# Altium PCB lab timer.PcbDoc
Units mil, origin at the board's own origin, x right, y up, seen from the top; angles counter-clockwise.
Board outline 6000 x 4000 mil, 2 copper layers (Top Layer, Bottom Layer); 7 components, 0 nets, 24 pads, 0 vias.
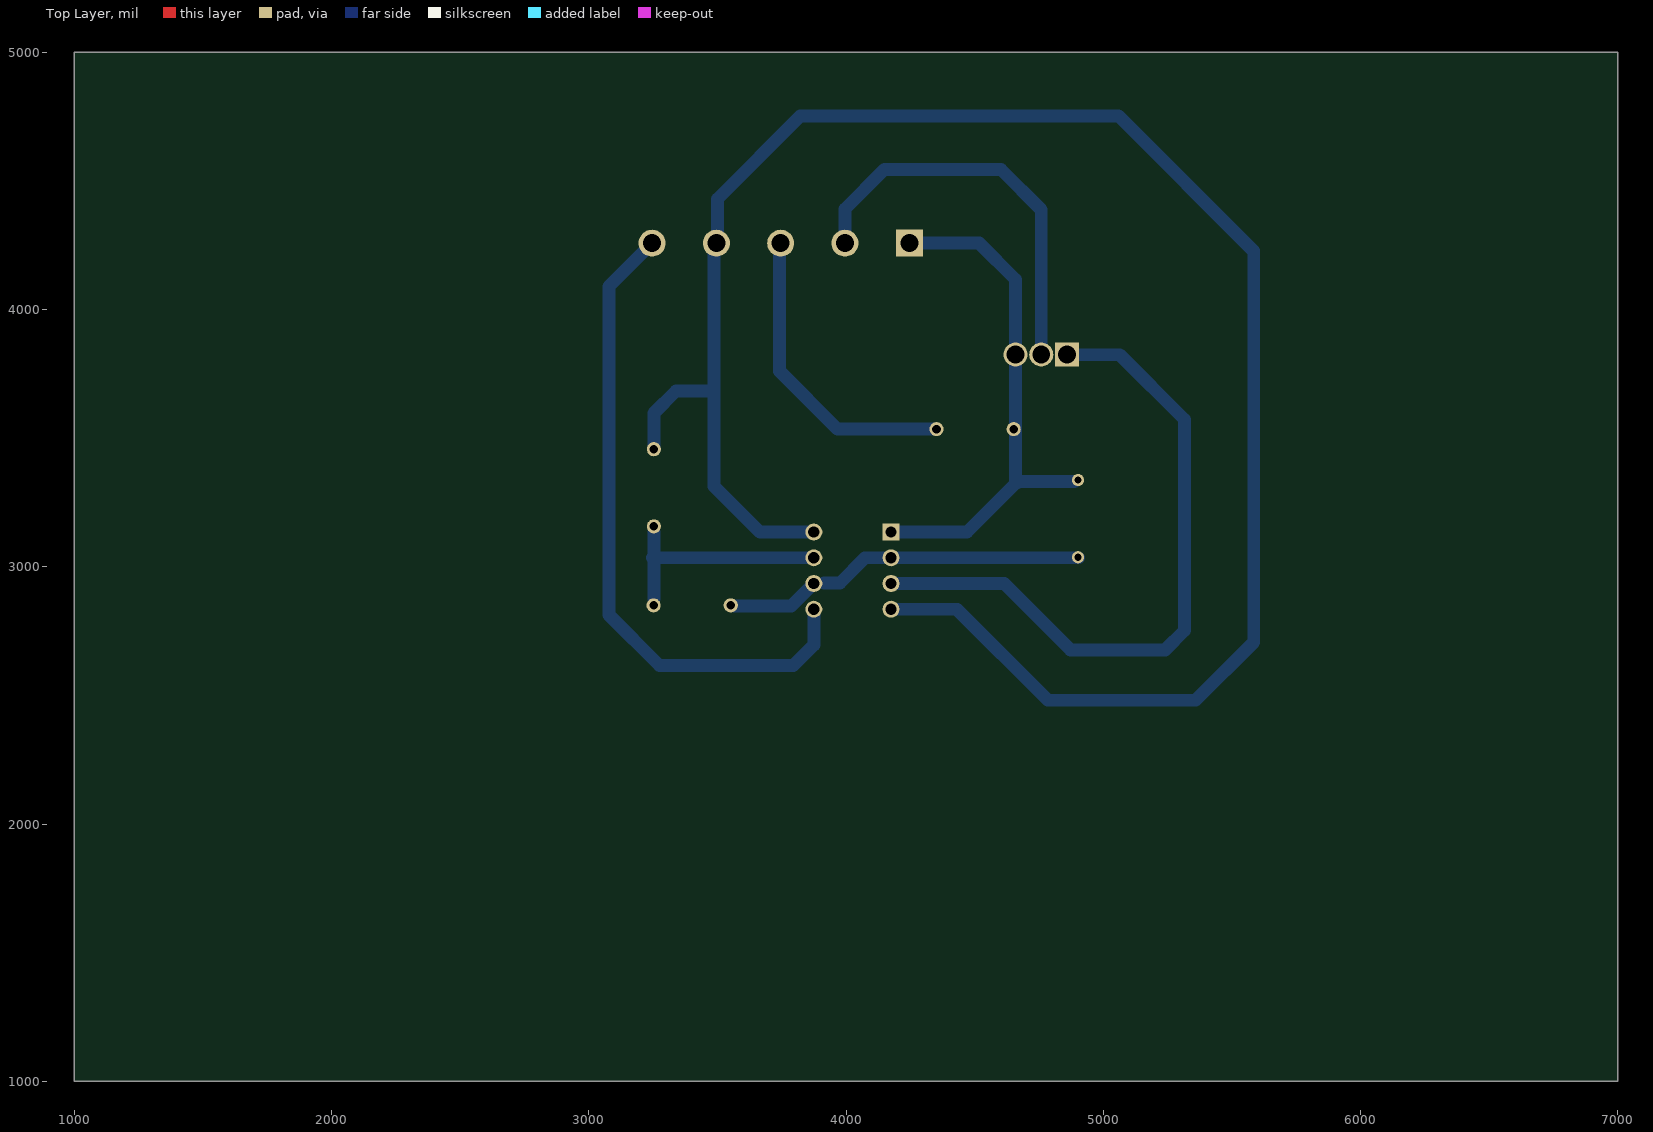
[diagram p0: Top Layer view]
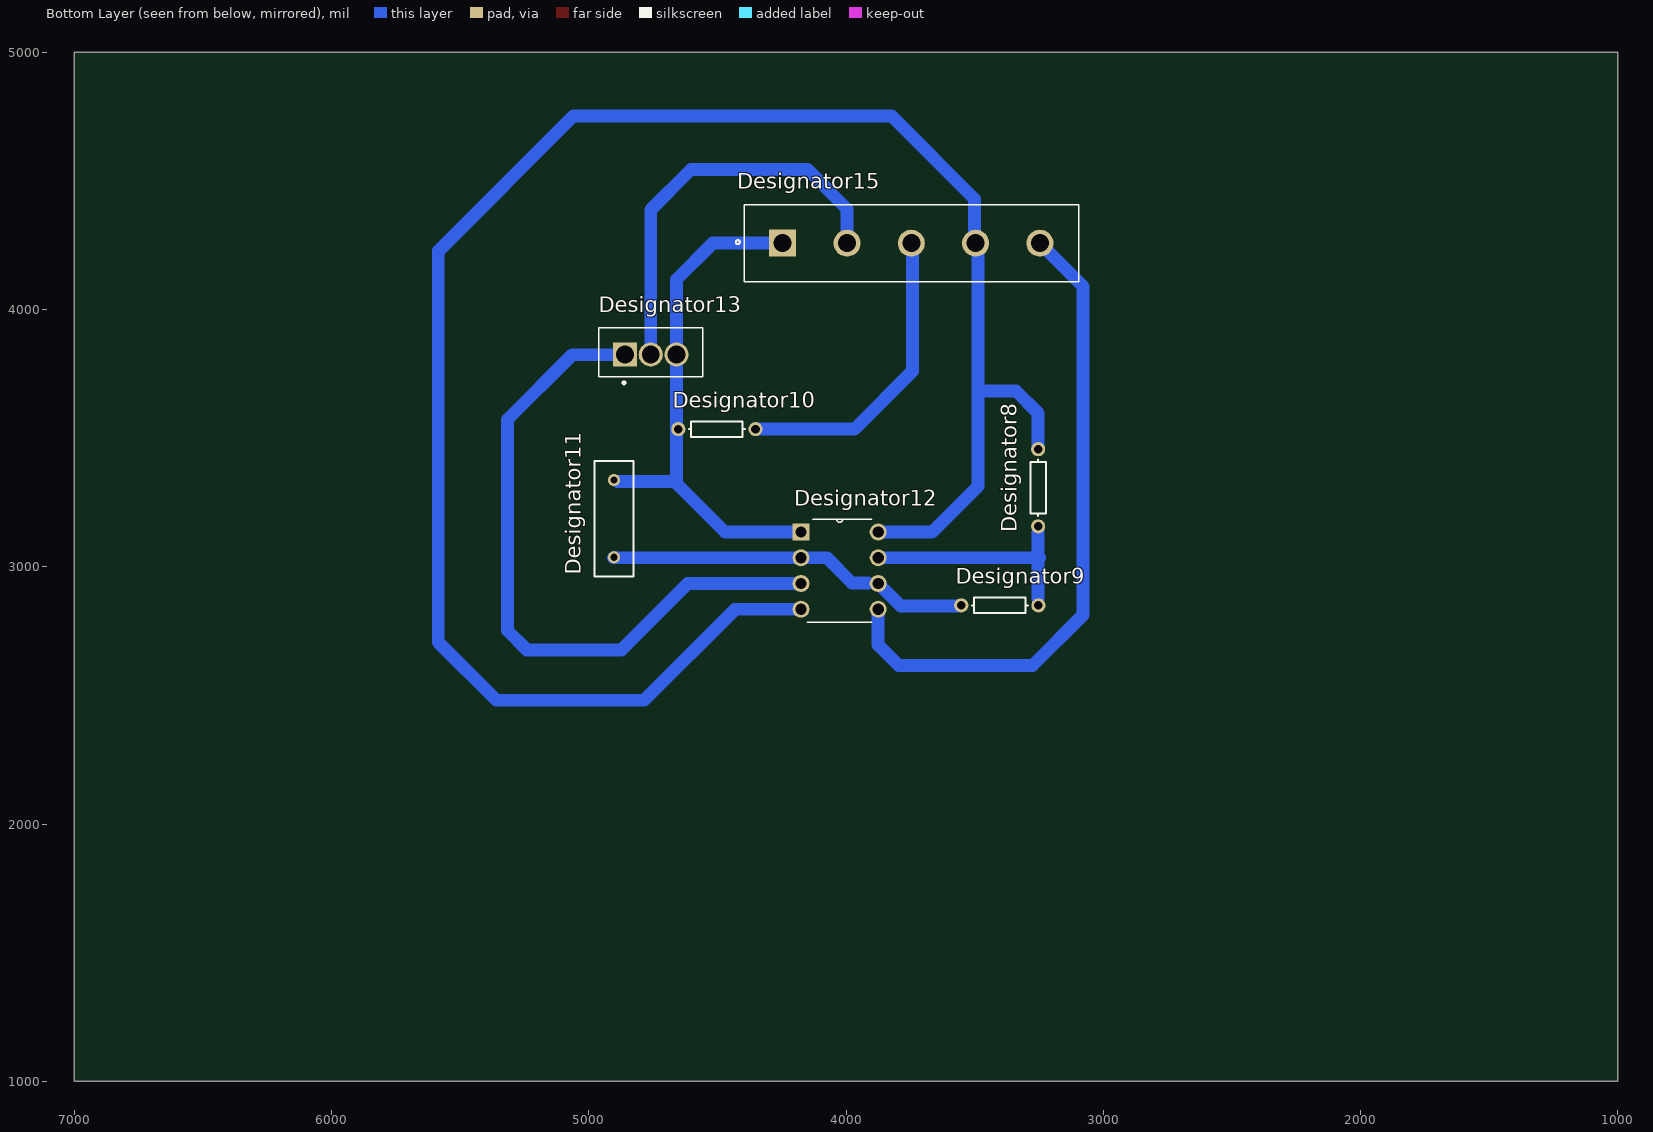
[diagram p1: Bottom Layer view, seen from below]

## Layer stack, top to bottom
Top Solder: solder mask 0.4, Solder Resist, Dk 3.5
Top Layer: signal copper 1.4
Dielectric 1: dielectric 12.6, FR-4, Dk 4.8
Bottom Layer: signal copper 1.4
Bottom Solder: solder mask 0.4, Solder Resist, Dk 3.5

## Board outline
1000,1000 7000,1000 7000,5000 1000,5000

## Design rules (kind name [scope] priority, off if disabled: settings)
Clearance [All] p1: gap=10 ignorepadtopadclearanceinfootprint=FALSE except(0: Arc-Hole Track-Hole SMDPad-Hole THPad-Hole Via-Hole Fill-Hole Poly-Hole Region-Hole Text-Hole)
PolygonConnect [All] p1: connectstyle=Relief reliefconductorwidth=10 reliefentries=4 polygonreliefangle="90 Angle" airgapwidth=10
RoutingVias [All] p1: holewidth=28 width=50 viastyle="Through Hole" minholewidth=28 minwidth=50 maxholewidth=28 maxwidth=50
SolderMaskExpansion [All] p1: expansion=4
Width [All] p1: maxlimit=10 minlimit=10 preferedwidth=10
30 further rules are at their usual default settings.

## Components (designator, comment, footprint, x,y, rotation, side; value= is the part's Value field where it differs from the comment)
Designator8 "Comment" AXIAL-0.3 3253,3307 r90 bottom
Designator9 "Comment" AXIAL-0.3 3402,2850 r180 bottom
Designator10 "Comment" AXIAL-0.3 4502,3535 r180 bottom
Designator11 "Comment" RAD-0.3 4902,3187 r90 bottom
Designator12 "Comment" DIP254P762X533-8 3875,2835 r180 bottom
Designator13 "Comment" TO254P1028X482X1968-3 4859,3825 r180 bottom
Designator15 "Comment" TE_640466-1 3746,4258 r180 bottom

## Footprints (in the part's own frame and the unit in brackets; to place one, negate y for a bottom-side part, rotate by r counter-clockwise, add the part's x,y. Pads: shape width x height; smd on the part's side, far side on the other; paste and mask are expansions set on the pad)
AXIAL-0.3 [mm] "Axial Device, Thru-Hole; 2 Leads; 0.3 in Pin Spacing"
  round 1.4 hole 0.85: 1(-3.81,0) 2(3.81,0)
  silkscreen extent -2.77,-0.76 2.77,0.76
DIP254P762X533-8 [mil]
  rect 66x66 hole 44: 1(-300,300)
  round 66 hole 44: 2(-300,200) 3(-300,100) 4(-300,0) 5(0,0) 6(0,100) 7(0,200) 8(0,300)
  silkscreen extent -275,-50 -25,350
RAD-0.3 [mm] "Radial Cap, Thru-Hole; 2 Leads; 0.3 in Pin Spacing"
  round 1.2 hole 0.7: 1(-3.81,0) 2(3.81,0)
  silkscreen extent -5.71,-1.91 5.71,1.91
TE_640466-1 [mm]
  rect 2.67x2.67 hole 1.78: 1(-12.7,0)
  round 2.67 hole 1.78: 2(-6.35,0) 3(0,0) 4(6.35,0) 5(12.7,0)
  silkscreen extent -17.33,-3.81 16.51,3.81
TO254P1028X482X1968-3 [mm]
  rect 2.38x2.38 hole 1.77: 1(0,0)
  round 2.38 hole 1.77: 2(2.54,0) 3(5.08,0)
  silkscreen extent -2.6,-2.92 7.68,2.64

## Nets (pads, with @x,y where several pads share a name; then routed paths per layer and width w, separated by ;. In a path a pad name is that pad's centre, name@x,y a point inside that pad or via, vN(x,y) a via of type N, cw(c..) or ccw(c..) an arc to the next point about the centre after c; other vN are vias at no path point)
pads on no net: Designator8.1 Designator8.2 Designator9.1 Designator9.2 Designator10.1 Designator10.2 Designator11.1 Designator11.2 Designator12.1 Designator12.2 Designator12.3 Designator12.4 Designator12.5 Designator12.6 Designator12.7 Designator12.8 Designator13.1 Designator13.2 Designator13.3 Designator15.1 Designator15.2 Designator15.3 Designator15.4 Designator15.5
copper on no net: | length 19955.7
  Bottom Layer w50: 3246,4258 3078,4090 3078,2813 3275,2616 3795,2616 3875,2696 3875,2835 ; 3248,3035 3875,3035 ; 3253,2874 3253,3134 ; 3253,3457 3253,3597 3339,3683 3486,3683 ; 3487,4245 3487,3313 3665,3135 3875,3135 ; 3500,4236 3500,4430 3822,4752 5060,4752 5585,4227 5585,2707 5359,2481 4785,2481 4431,2835 4180,2835 ; 3565,2847 3787,2847 3875,2935 ; 3742,4273 3742,3760 3967,3535 4352,3535 ; 3914.38,2937.19 3976.19,2937.19 4074,3035 4175,3035 4904,3035 ; 3996,4258 3996,4391 4149,4544 4603,4544 4759,4388 4759,3825 ; 4175,2935 4615,2935 4873,2677 5241,2677 5316,2752 5316,3572 5064,3824 4845,3824 ; 4175,3135 4470,3135 4659,3324 4660,3323 4669,3332 4888,3332 ; 4246,4258 4518,4258 4659,4117 4659,3332